# Altium PCB BMS_MASTER.PcbDoc (part 1 of 2)
Units mm, origin at the board's own origin, x right, y up, seen from the top; angles counter-clockwise.
Board outline 297.7 x 100 mm, 4 copper layers (Top Layer, Layer 1, Layer 2, Bottom Layer), stack 0.603 mm thick; 101 components, 64 nets, 488 pads, 105 vias.
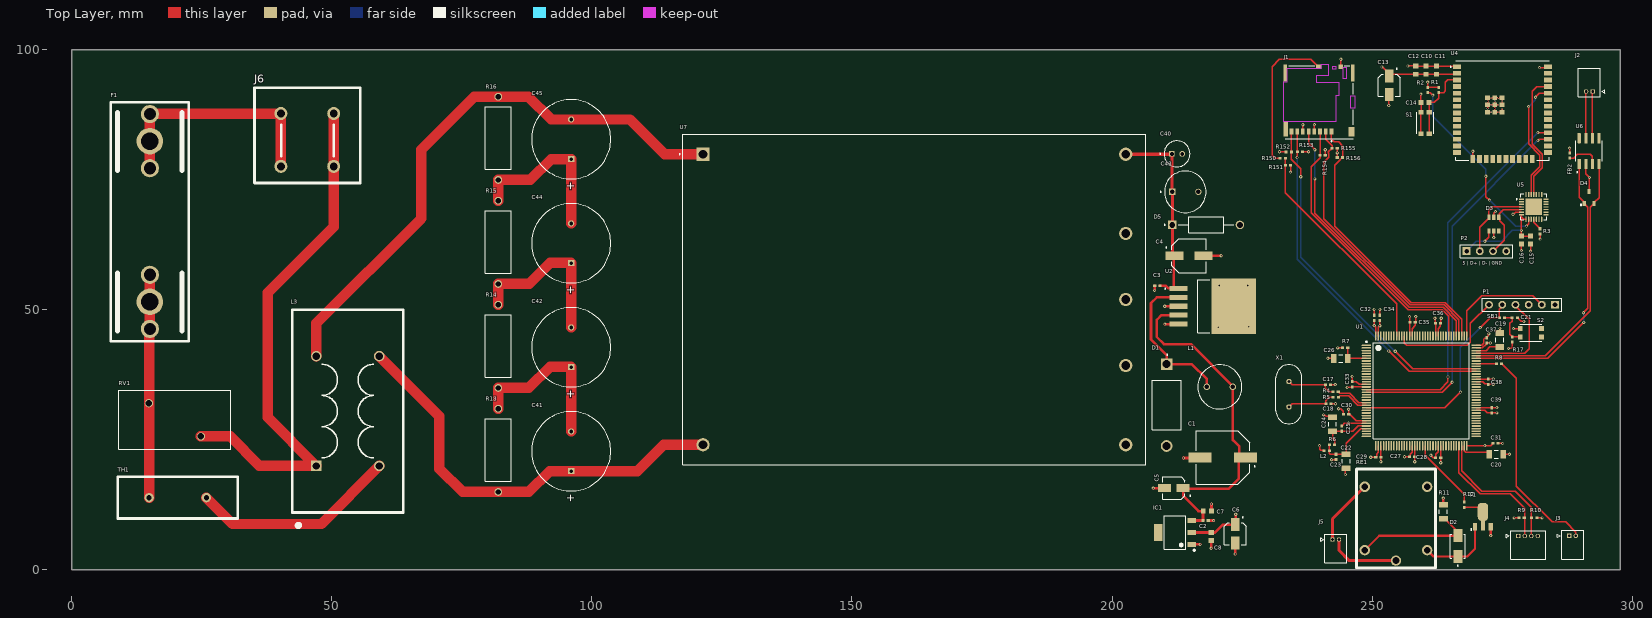
[diagram p0: Top Layer view]
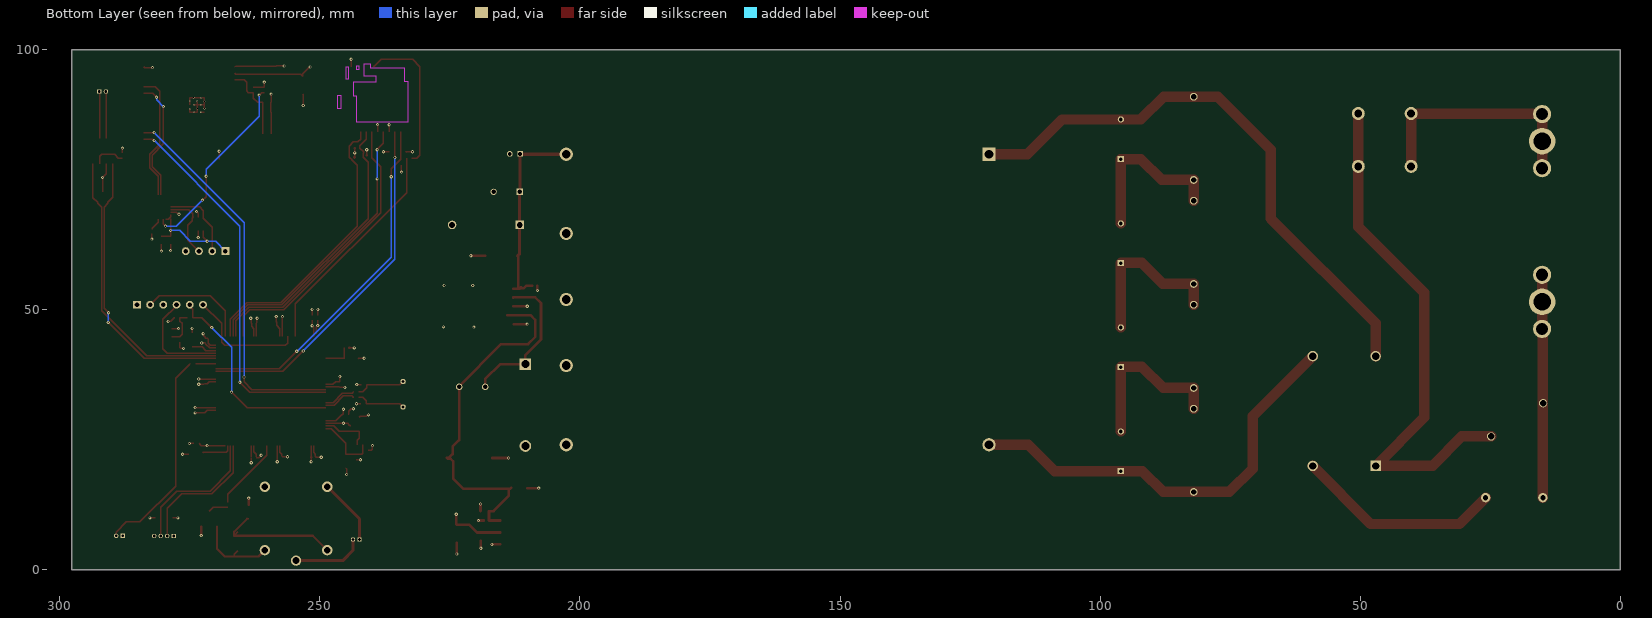
[diagram p1: Bottom Layer view, seen from below]
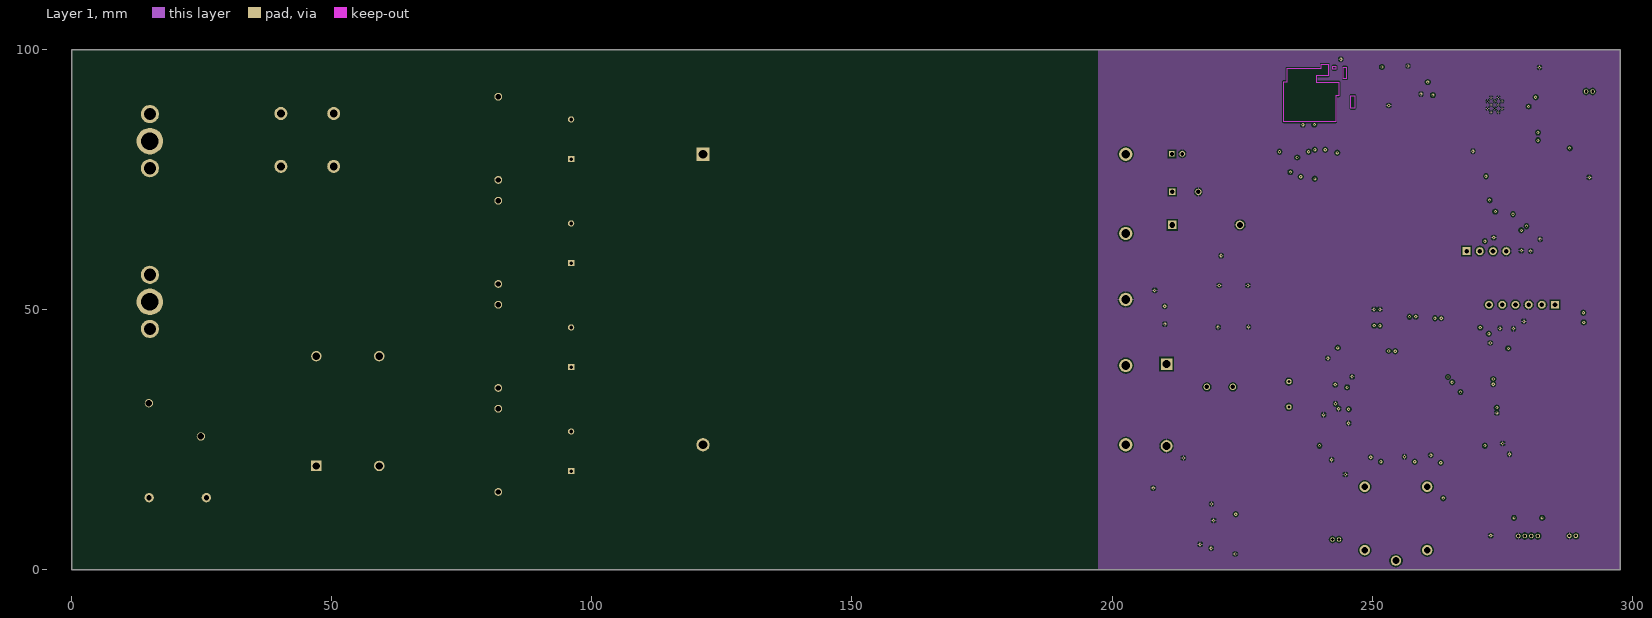
[diagram p2: Layer 1]
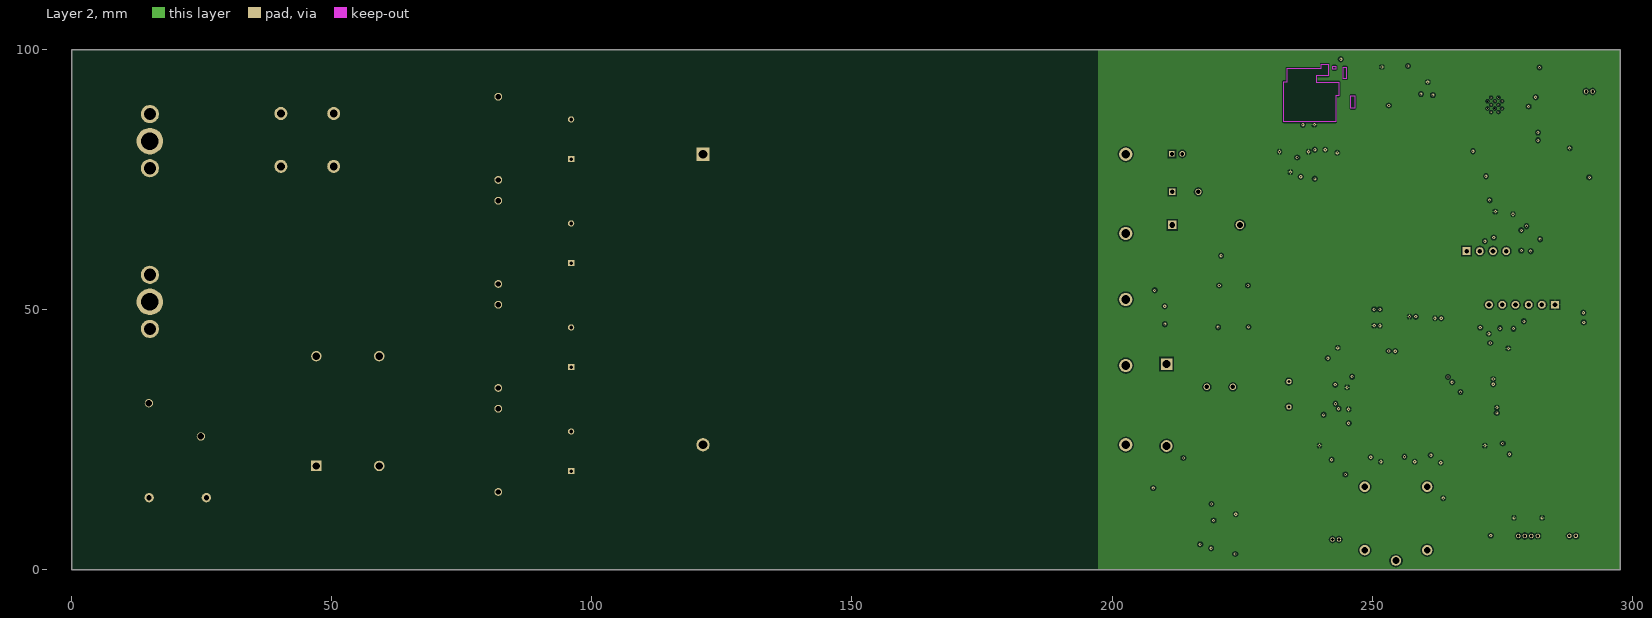
[diagram p3: Layer 2]

## Layer stack, top to bottom
Top Solder: solder mask 0.0102, Solder Resist, Dk 3.5
Top Layer: signal copper 0.0356
Dielectric 2: prepreg 0.0711, PP-006, Dk 4.1
Layer 1: signal copper 0.035
Dielectric 1: dielectric 0.32, FR-4, Dk 4.8
Layer 2: signal copper 0.035
Dielectric 3: prepreg 0.0711, PP-006, Dk 4.1
Bottom Layer: signal copper 0.0356
Bottom Solder: solder mask 0.0102, Solder Resist, Dk 3.5

## Board outline
0,0 297.7,0 297.7,100 0,100

## Design rules (kind name [scope] priority, off if disabled: settings)
Clearance [All] p1: gap=0.254 ignorepadtopadclearanceinfootprint=FALSE except(0: Arc-Hole Track-Hole SMDPad-Hole Via-Hole Fill-Hole Poly-Hole Region-Hole Text-Hole; 0.127: SMDPad-SMDPad; 0.2: Arc-Arc Arc-Track Arc-SMDPad Arc-THPad Track-Track Track-SMDPad Track-THPad; 0.5: THPad-THPad THPad-Hole)
PolygonConnect [All] p1: connectstyle=Relief reliefconductorwidth=0.254 reliefentries=4 polygonreliefangle="90 Angle" airgapwidth=0.254
RoomDefinition PSU [InComponentClass('PSU')] p1: confinementstyle=ConfineIn formatcopy=TRUE lockcomponents=FALSE outline 206.8,0 230,0 230,64.2 206.8,64.2
RoomDefinition HV_PSU [InComponentClass('HV_PSU')] p2: confinementstyle=ConfineIn formatcopy=TRUE lockcomponents=FALSE outline 0,0 230,0 230,100 0,100
RoomDefinition WIFI [InComponentClass('WIFI')] p3: confinementstyle=ConfineIn formatcopy=TRUE lockcomponents=FALSE outline 247.2,58.51 286.91,58.51 286.91,100 247.2,100
RoomDefinition SDCARD [InComponentClass('SDCARD')] p4: confinementstyle=ConfineIn formatcopy=TRUE lockcomponents=FALSE outline 230,58.5 247.2,58.5 247.2,99.75 230,99.75
RoomDefinition MCU [InComponentClass('MCU')] p5: confinementstyle=ConfineIn formatcopy=TRUE lockcomponents=FALSE outline 230,0 297.8,0 297.8,58.5 230,58.5
RoomDefinition CAN [InComponentClass('CAN')] p6: confinementstyle=ConfineIn formatcopy=TRUE lockcomponents=FALSE outline 286.91,58.51 297.7,58.51 297.7,100 286.91,100
RoutingVias [All] p1: holewidth=0.3 width=0.6 viastyle="Through Hole" minholewidth=0.24 minwidth=0.46 maxholewidth=1 maxwidth=1.4
SolderMaskExpansion [All] p1: expansion=0.102 istentingtop=FALSE
Width [All] p1: maxlimit=5 minlimit=0.09 preferedwidth=0.254 midlayer1_minwidth=0.254 midlayer1_maxwidth=0.254 midlayer2_minwidth=0.254 midlayer2_maxwidth=0.254 minimp=50.000000 maximp=50.000000 favimp=50.000000
30 further rules are at their usual default settings.

## Classes and differential pairs
component class HV_PSU: C40 C41 C42 C43 C44 C45 D5 F1 J6 L3 R13 R14 R15 R16 RV1 TH1 U7
component class CAN: D4 FB2 J2 U6
component class WIFI: C10 C11 C12 C13 C14 C15 C16 D3 P2 R1 R2 R3 S1 U4 U5
component class SDCARD: J1 R150 R151 R152 R153 R154 R155 R156
component class PSU: C1 C2 C3 C4 C5 C6 C7 C8 D1 IC1 L1 U2
component class MCU: C17 C18 C19 C20 C21 C22 C23 C24 C25 C26 C27 C28 C29 C30 C31 C32 C33 C34 C35 C36 C37 C38 C39 D2 J3 J4 J5 L2 P1 R4 R5 R6 R7 R8 R9 R10 R11 R12 R17 RE1 S2 SB1 T1 U1 X1

## Components (designator, comment, footprint, x,y, rotation, side; value= is the part's Value field where it differs from the comment)
C1 "330uF" CAP_16SVP330M 221.3,21.6 r180 top
C2 "Cap" 0402 218,9.5 r180 top value=100nF
C3 "Cap" 0402 208.72,54.68 r0 top value=1uF
C4 "680uF" CAP_16SVPC100M 214.8,60.4 r0 top
C5 "4,7uF" CAP_EEE1CA100SR 211.88,15.74 r180 top
C6 "10uF" CAP_EEE1CA100SR 223.7,6.95 r270 top
C7 "100nF" CAPC1608X90N 218.33,11.32 r0 top
C8 "100nF" CAPC1608X90N 219.08,6.42 r270 top
C10 "10uF" CAPC1608X90N 260.4,96.1 r90 top
C11 "100nF" CAPC1608X90N 262.4,96.1 r90 top
C12 "100nF" CAPC1608X90N 258.4,96.1 r270 top
C13 "4.7u" CAP_EEE1CA100SR 253.3,93.2 r270 top
C14 "100nF" CAPC1608X90N 260.2,89.9 r0 top
C15 "100nF" CAPC1608X90N 280.474,63.425 r90 top
C16 "1uF" CAPC1608X90N 278.7,63.425 r90 top
C17 "20pF" 0402 241.512,35.644 r0 top value=100nF
C18 "20pF" 0402 241.612,31.944 r0 top value=100nF
C19 "2.2uF" C1206 274.54,44.22 r90 top
C20 "2.2uF" C1206 273.86,22.246 r0 top
C21 "100nF" 0402 277.44,48.52 r180 top
C22 "1uF" C1206 245.012,20.894 r270 top value=10uF
C23 "100nF" 0402 243.062,21.734 r90 top
C24 "1uF" C1206 242.412,27.994 r90 top value=10uF
C25 "100nF" 0402 244.192,27.174 r90 top
C26 "1uF" C1206 243.97,40.65 r0 top value=100nF
C27 "100nF" 0402 257.7,21.8 r180 top
C28 "100nF" 0402 262.7,21.6 r180 top
C29 "100nF" 0402 251.2,21.7 r180 top
C30 "100nF" 0402 245.012,29.964 r180 top
C31 "100nF" 0402 273.75,24.35 r0 top
C32 "100nF" 0402 250.412,48.481 r90 top
C33 "100nF" 0402 246.2,35.7 r90 top
C34 "100nF" 0402 251.512,48.481 r90 top
C35 "100nF" 0402 257.812,47.644 r0 top
C36 "100nF" 0402 262.69,47.44 r0 top
C37 "100nF" 0402 272.06,44.15 r270 top
C38 "100nF" 0402 272.31,36.19 r270 top
C39 "100nF" 0402 273.01,30.68 r270 top
C40 "EEUEB1H2R2S" CAPPRD200W50D500H1100 212.5,80 r0 top
C41 "Cap Pol1" RB7.6-15 96,22.81 r270 top value=47uF/450v
C42 "Cap Pol1" RB7.6-15 96,42.81 r270 top value=47uF/450v
C43 "EEUFR1V221B" CAPPRD500W60D800H1150 214.1,72.696 r0 top
C44 "Cap Pol1" RB7.6-15 96,62.81 r270 top value=47uF/450v
C45 "Cap Pol1" RB7.6-15 96,82.81 r270 top value=47uF/450v
D1 "MBR360" DIOAD1950W125L950D560 210.5,31.7 r270 top
D2 "B160-13-F" DIODE_B160-13-F 266.497,4.58 r90 top
D3 "TVS Diode Array" SOT23-6-V2 273.4,65.2 r0 top
D4 "PESD2CAN,215" SOT95P230X110-3N 291.75,71.61 r90 top
D5 "P6KE20CA" DIOAD1300W80L670D310 218.1,66.341 r0 top
F1 "Heavy Duty Fuse Clip" 8040.2012.01 15,67 r270 top
FB2 "60R@100MHz" 0402 288,79.7 r90 top
IC1 "SPX1117M3-L-3-3/TR" SOT230P700X180-3N 212.1,7.2 r180 top
J1 "503398-1892" MOLEX_503398-1892 239.82,89.909 r180 top
J2 "530480210" MOLEX_530480210 292.4,92 r180 top
J3 "530480210 do LED" MOLEX_530480210 287.94,6.54 r0 top
J4 "530480410" MOLEX_530480410 278.13,6.53 r0 top
J5 "530480210" MOLEX_530480210 242.39,5.85 r0 top
J6 "14020225402000" 14020225402000 45.27,82.68 r180 top
L1 "AIUR-06-181" INDRD500W70D850H750 220.728,35.2 r0 top
L2 "BEAD" 0402 241.292,22.954 r0 top value=100uH
L3 "Line filter" SCF29XV-070-1R2A030JV 53.05,30.55 r90 top
P1 "Header 6" HDR1X6 285.19,50.99 r180 top
P2 "Header 4" HDR1X4 268.18,61.3 r0 top
R1 "10k" 0402 262.8,92.3 r270 top
R2 "4.7k" 0402 260.7,92.3 r90 top
R3 "10k" 0402 282.3,65.1 r270 top
R4 "0" 0402 242.992,34.274 r180 top value=10K
R5 "220" 0402 243.012,33.198 r180 top value=10K
R6 "0" 0402 242.312,24.058 r0 top value=10K
R7 "0" 0402 244.82,42.69 r0 top value=10K
R8 "100" 0402 274.42,39.67 r180 top value=10K
R9 "4.7k" 0402 278.77,10.01 r0 top value=10K
R10 "4.7k" 0402 281.18,10.02 r180 top value=10K
R11 "Res1" C1206 263.704,11.21 r90 top value=2R3
R12 "2.2k" 0402 267.73,12.54 r270 top value=10K
R13 "OY100KE" RESAD4700W80L1900D700 82,23 r90 top
R14 "OY100KE" RESAD4700W80L1900D700 82,43 r90 top
R15 "OY100KE" RESAD4700W80L1900D700 82,63 r90 top
R16 "OY100KE" RESAD4700W80L1900D700 82,83 r90 top
R17 "100K" 0402 276.96,44.31 r270 top value=10K
R150 "Res1" 0402 232.83,79.16 r0 top value=0
R151 "Res1" 0402 233.84,77.8 r0 top value=10K
R152 "Res1" 0402 233.98,80.36 r180 top value=47K
R153 "Res1" 0402 236.134,80.38 r0 top value=47K
R154 "Res1" 0402 240.51,79.76 r0 top value=47K
R155 "Res1" 0402 242.8,81.1 r0 top value=47K
R156 "Res1" 0402 243.8,79.3 r180 top value=47K
RE1 "36.11.9.003.4011" 36.11.9.003.4011 262.2,19.4 r90 top
RV1 "B72220S0102K101" VAR_B72220S0102K101 19.81,28.87 r180 top
S1 "KMR621NGLFS" SW_KMR621NGLFS 260.2,85.95 r90 top
S2 "KMR621NGLFS" SW_KMR621NGLFS 280.53,45.61 r0 top
SB1 "Circuit Breaker" 0402 275,48.5 r0 top
T1 "2DD1664Q-13" SOT150P410X160-3N 271.32,10.28 r0 top
TH1 "NTC THERMISTOR" MF72-10D20M 20.36,13.9 r0 top
U1 "STM32F429ZIT6" STM-LQFP144_N 259.462,34.431 r0 top
U2 "LM2596S-5V/NOPB" VREG_LM2596S-ADJ/NOPB 223.4,50.7 r0 top
U4 "ESP32-WROOM-32UE(M113EH6400UH3Q0)" MODULE_ESP32-WROOM-32UE(M113EH6400UH3Q0) 275.1,88.35 r0 top
U5 "CP2102-GM" QFN50P500X500X100-29N 281.1,69.8 r0 top
U6 "SN65HVD232DR" SOIC127P599X175-8N 291.738,80.54 r90 top
U7 "AE40-EW-S12" CONV_AE40-EW-S12 162,52 r0 top
X1 "8MHz" 8M-49S-SR 234.012,33.784 r90 top

## Footprints (in the part's own frame and the unit in brackets; to place one, negate y for a bottom-side part, rotate by r counter-clockwise, add the part's x,y. Pads: shape width x height; smd on the part's side, far side on the other; paste and mask are expansions set on the pad)
8M-49S-SR [mm]
  round 1.03 hole 0.63: 1(-2.44,0) 2(2.44,0)
  silkscreen extent -5.68,-2.5 5.68,2.5, body extent -5.68,-2.54 5.68,2.46, height 2.1
36.11.9.003.4011 [mm]
  round 2 hole 1.3: 1(-15.6,13.6) 2(-17.6,7.6) 3(-15.6,1.6) 4(-3.4,13.6) 5(-3.4,1.6)
  silkscreen extent -19,0 0,15.2
0402 [mm] "Chip Capacitor, Body 1.0x0.5mm, IPC High Density"
  rect 0.6x0.5 smd: 1(-0.5,0) 2(0.5,0)
  body extent -0.55,-0.3 0.55,0.3, height 1.3
8040.2012.01 [mm] "Heavy Duty Fuse Clip"
  round 3.5 hole 2.35: 1(-20.65,0) 1(-10.25,0) 2(10.25,0) 2(20.65,0)
  round 5.1 hole 3.4: 1(-15.45,0) 2(15.45,0)
  silkscreen extent -22.95,-7.5 23.05,7.5
14020225402000 [mm]
  round 2.5 hole 1.5: 1(-5.08,5.08) 1(-5.08,-5.08) 2(5.08,5.08) 2(5.08,-5.08)
  silkscreen extent -10.16,-10.02 10.16,8.28, body extent -10.06,-10 10.26,8.3, height 29.3
C1206 [mm] "Chip Capacitor, Body 3.2x1.6mm, IPC High Density"
  rect 1.1x1.7 smd: 1(-1.35,0) 2(1.35,0)
  silkscreen extent -0.4,-0.75 0.4,0.75, body extent -1.7,-0.9 1.7,0.9, height 1.3
CAP_16SVP330M [mm]
  rect 4.4x1.9 smd: 1(-4.35,0) 2(4.35,0)
  silkscreen extent -6.2,-5.15 5.15,5.15, body extent -5.5,-5.15 5.5,5.15, height 12.6
CAP_16SVPC100M [mm]
  rect 3.5x1.6 smd: 1(-2.8,0) 2(2.8,0)
  silkscreen extent -4.45,-3.3 3.3,3.3, body extent -3.65,-3.3 3.65,3.3, height 5.9
CAP_EEE1CA100SR [mm]
  rect 2.5x1.6 smd: 1(-1.75,0) 2(1.75,0)
  silkscreen extent -3.25,-2.15 2.15,2.15, body extent -2.5,-2.15 2.5,2.15, height 5.4
CAPC1608X90N [mm]
  rect 0.92x0.97 smd: 1(-0.775,0) 2(0.775,0)
  body extent -0.8,-0.4 0.8,0.4, height 0.95
CAPPRD200W50D500H1100 [mm]
  round 1.1 hole 0.75: N(1,0)
  rect 1.1x1.1 hole 0.75: P(-1,0)
  silkscreen extent -3.35,-2.5 2.5,2.5, body extent -2.5,-2.5 2.5,2.5, height 11
CAPPRD500W60D800H1150 [mm]
  round 1.2 hole 0.85: N(2.5,0)
  rect 1.2x1.2 hole 0.85: P(-2.5,0)
  silkscreen extent -4.85,-4 4,4, body extent -4,-4 4,4, height 11.5
CONV_AE40-EW-S12 [mm]
  rect 2.55x2.55 hole 1.7: 1(-40.65,27.94)
  round 2.55 hole 1.7: 2(-40.65,-27.94) 3(40.65,27.94) 4(40.65,12.7) 5(40.65,0) 6(40.65,-12.7) 7(40.65,-27.94)
  silkscreen extent -45.25,-31.75 44.5,31.75, body extent -44.46,-31.75 44.54,31.75, height 25
DIOAD1300W80L670D310 [mm]
  round 1.65 hole 1.1: A(6.5,0)
  rect 1.65x1.65 hole 1.1: C(-6.5,0)
  silkscreen extent -8.1,-1.55 5.32,1.55, body extent -6.9,-1.8 6.9,1.8, height 3.6
DIOAD1950W125L950D560 [mm]
  round 2.25 hole 1.5: A(7.874,0)
  rect 2.25x2.25 hole 1.5: C(-7.874,0)
  silkscreen extent -9.81,-2.8 4.75,2.8, body extent -8.43,-2.79 8.43,2.79, height 5.6
DIODE_B160-13-F [mm]
  rect 2.5x1.7 smd: 1(-2,0) 2(2,0)
  silkscreen extent -3.85,-1.46 2.3,1.46
HDR1X4 [mm] "Connector; Header; 4 Position"
  rect 1.5x1.5 hole 0.9: 1(0,0)
  round 1.5 hole 0.9: 2(2.54,0) 3(5.08,0) 4(7.62,0)
  silkscreen extent -1.27,-1.27 8.89,1.27
HDR1X6 [mm] "Connector; Header; 6 Position"
  rect 1.5x1.5 hole 0.9: 1(0,0)
  round 1.5 hole 0.9: 2(2.54,0) 3(5.08,0) 4(7.62,0) 5(10.16,0) 6(12.7,0)
  silkscreen extent -1.27,-1.27 13.97,1.27
INDRD500W70D850H750 [mm]
  round 1.25 hole 0.9: 1(-2.5,0) 2(2.5,0)
  silkscreen extent -4.25,-4.25 4.25,4.25, body extent -6.35,-6.35 6.35,6.35, height 18.03
MF72-10D20M [mm] "NTC THERMISTOR"
  round 1.8 hole 1: 1(-5.5,0) 2(5.5,0)
  silkscreen extent -11.5,-4 11.5,4
MODULE_ESP32-WROOM-32UE(M113EH6400UH3Q0) [mm]
  rect 1.5x0.9 smd: 1(-8.75,8.41) 2(-8.75,7.14) 3(-8.75,5.87) 4(-8.75,4.6) 5(-8.75,3.33) 6(-8.75,2.06) 7(-8.75,0.79) 8(-8.75,-0.48) 9(-8.75,-1.75) 10(-8.75,-3.02) 11(-8.75,-4.29) 12(-8.75,-5.56) 13(-8.75,-6.83) 14(-8.75,-8.1) 25(8.75,-8.1) 26(8.75,-6.83) 27(8.75,-5.56) 28(8.75,-4.29) 29(8.75,-3.02) 30(8.75,-1.75) 31(8.75,-0.48) 32(8.75,0.79) 33(8.75,2.06) 34(8.75,3.33) 35(8.75,4.6) 36(8.75,5.87) 37(8.75,7.14) 38(8.75,8.41)
  rect 0.9x1.5 smd: 15(-5.71,-9.35) 16(-4.44,-9.35) 17(-3.17,-9.35) 18(-1.9,-9.35) 19(-0.63,-9.35) 20(0.64,-9.35) 21(1.91,-9.35) 22(3.18,-9.35) 23(4.45,-9.35) 24(5.72,-9.35)
  rect 0.9x0.9 smd: 39_1(-2.9,2.47) 39_2(-1.5,2.47) 39_3(-0.1,2.47) 39_4(-2.9,1.07) 39_5(-1.5,1.07) 39_6(-0.1,1.07) 39_7(-2.9,-0.33) 39_8(-1.5,-0.33) 39_9(-0.1,-0.33)
  round 0.3 hole 0.2: 39_10(-2.2,2.47) 39_11(-0.8,2.47) 39_12(-2.9,1.77) 39_13(-1.5,1.77) 39_14(-0.1,1.77) 39_15(-2.2,1.07) 39_16(-0.8,1.07) 39_17(-2.9,0.37) 39_18(-1.5,0.37) 39_19(-0.1,0.37) 39_20(-2.2,-0.33) 39_21(-0.8,-0.33)
  silkscreen extent -10.1,-9.6 9,9.6, body extent -9,-9.6 9,9.6, height 3.35
MOLEX_503398-1892 [mm]
  rect 0.7x1.1 smd: 1(-2.38,5.625) 2(-1.28,5.625) 3(-0.18,5.625) 4(0.92,5.625) 5(2.02,5.625) 6(3.12,5.625) 7(4.22,5.625) 8(5.32,5.625)
  rect 0.9x0.93 smd: 9(-4.17,-6.84)
  rect 1.05x0.78 smd: 10(0.095,-6.915)
  rect 1.14x1.83 smd: P1(-6.26,5.61)
  rect 0.86x2.8 smd: P2(6.4,5.125)
  rect 0.7x3.33 smd: P3(-6.48,-5.64) P4(6.48,-5.64)
  Keep-Out Layer region: 6.83,-3.975 6.13,-3.975 6.13,-6.525 -0.43,-6.525 -0.43,-7.305 -1.73,-7.305 -1.73,-5.125 0.57,-5.125 0.57,-3.875 -3.82,-3.875 -3.82,-1.275 -3.17,-1.275 -3.17,3.725 6.83,3.725
  Keep-Out Layer region: -6.13,-1.276 -6.836,-1.276 -6.836,1.125 -6.13,1.125
  Keep-Out Layer region: -4.685,-6.738 -5.245,-6.738 -5.245,-4.575 -4.685,-4.575
  Keep-Out Layer region: -2.67,-6.93 -3.223,-6.93 -3.223,-6.375 -2.67,-6.375
  silkscreen extent -6.55,-7.02 6.55,7.57, body extent -6.55,-7.02 6.55,7.04, height 1.4
MOLEX_530480210 [mm]
  rect 0.85x0.85 / inner round 0.85 / far side rect 0.85x0.85 hole 0.5 mask+0.076: 1(0,0)
  round 0.85 hole 0.5 mask+0.076: 2(1.25,0)
  silkscreen extent -2.3,-4.45 2.75,1.05, body extent -1.49,-4.48 2.76,1.02, height 3.52
MOLEX_530480410 [mm]
  rect 0.85x0.85 / inner round 0.85 / far side rect 0.85x0.85 hole 0.5 mask+0.076: 1(0,0)
  round 0.85 hole 0.5 mask+0.076: 2(1.25,0) 3(2.5,0) 4(3.75,0)
  silkscreen extent -2.3,-4.45 5.25,1.05, body extent -1.52,-4.46 5.23,1.04, height 3.52
QFN50P500X500X100-29N [mm]
  rrect50% 0.97x0.26 smd: 1(-2.37,1.5) 2(-2.37,1) 3(-2.37,0.5) 4(-2.37,0) 5(-2.37,-0.5) 6(-2.37,-1) 7(-2.37,-1.5) 15(2.37,-1.5) 16(2.37,-1) 17(2.37,-0.5) 18(2.37,0) 19(2.37,0.5) 20(2.37,1) 21(2.37,1.5)
  rrect50% 0.26x0.97 smd: 8(-1.5,-2.37) 9(-1,-2.37) 10(-0.5,-2.37) 11(0,-2.37) 12(0.5,-2.37) 13(1,-2.37) 14(1.5,-2.37) 22(1.5,2.37) 23(1,2.37) 24(0.5,2.37) 25(0,2.37) 26(-0.5,2.37) 27(-1,2.37) 28(-1.5,2.37)
  rect 3.15x3.15 smd paste-0.585: 29(0,0)
  silkscreen extent -3.4,-2.5 2.5,2.5, body extent -2.5,-2.5 2.5,2.5, height 1
RB7.6-15 [mm] "Polarized Capacitor (Radial); 2 Leads"
  rect 1.2x1.2 hole 0.7: 1(3.81,0)
  round 1.2 hole 0.7: 2(-3.81,0)
  silkscreen extent -7.62,-7.62 7.62,7.62
RESAD4700W80L1900D700 [mm]
  round 1.5 hole 1: 1(-8,0) 2(8,0)
  silkscreen extent -5.97,-2.5 6.05,2.5
SCF29XV-070-1R2A030JV [mm]
  rect 2x2 hole 1.4: 1(-10.55,6.05)
  round 2 hole 1.4: 2(-10.55,-6.05) 3(10.55,6.05) 4(10.55,-6.05)
  silkscreen extent -22.2,-10.7 19.5,10.7
SOIC127P599X175-8N [mm]
  rrect25% 1.97x0.6 smd: 1(-2.47,1.905) 2(-2.47,0.635) 3(-2.47,-0.635) 4(-2.47,-1.905) 5(2.47,-1.905) 6(2.47,-0.635) 7(2.47,0.635) 8(2.47,1.905)
  silkscreen extent -4.14,-2.52 1.95,2.52, body extent -3,-2.45 3,2.45, height 1.75
SOT23-6-V2 [mm] "SOT23-6"
  round 0.3 on Top Overlay: 1(-1.6,-0.1)
  rect 0.6x1 smd: 1(-0.95,0) 2(0,0) 3(0.95,0) 4(0.95,2.6) 5(0,2.6) 6(-0.95,2.6)
  body extent -1.46,0.13 1.46,2.47, height 1
SOT95P230X110-3N [mm]
  rect 1x0.6 smd: 1(-1.15,0.95) 2(-1.15,-0.95) 3(1.15,0)
  silkscreen extent -1.54,1.46 -1.26,1.74, body extent -1.15,-1.45 1.15,1.45, height 1.1
SOT150P410X160-3N [mm]
  rect 0.8x1.4 smd: 1(-1.499,-1.981) 3(1.499,-1.981)
  rect 0.8x1.9 smd: 2(0,-1.727)
  rrect75% 2x3.5 smd paste-3: 4(0,0.889)
  silkscreen extent -2.38,-2.63 -2.12,-2.37
SOT230P700X180-3N [mm]
  rect 1.65x0.95 smd: 1(-3.2,2.3) 2(-3.2,0) 3(-3.2,-2.3)
  rect 1.65x3.2 smd: 4(3.2,0)
  silkscreen extent -3.8,-3.25 2.05,3.5, body extent -3.52,-3.25 3.52,3.25, height 1.8
STM-LQFP144_N [mm] "Thin QFP, 144-Leads, Body 20x20mm, Pitch 0.5mm, IPC Medium Density"
  oval 1.8x0.3 smd: 1(-10.55,8.75) 2(-10.55,8.25) 3(-10.55,7.75) 4(-10.55,7.25) 5(-10.55,6.75) 6(-10.55,6.25) 7(-10.55,5.75) 8(-10.55,5.25) 9(-10.55,4.75) 10(-10.55,4.25) 11(-10.55,3.75) 12(-10.55,3.25) 13(-10.55,2.75) 14(-10.55,2.25) 15(-10.55,1.75) 16(-10.55,1.25) 17(-10.55,0.75) 18(-10.55,0.25) 19(-10.55,-0.25) 20(-10.55,-0.75) 21(-10.55,-1.25) 22(-10.55,-1.75) 23(-10.55,-2.25) 24(-10.55,-2.75) 25(-10.55,-3.25) 26(-10.55,-3.75) 27(-10.55,-4.25) 28(-10.55,-4.75) 29(-10.55,-5.25) 30(-10.55,-5.75) 31(-10.55,-6.25) 32(-10.55,-6.75) 33(-10.55,-7.25) 34(-10.55,-7.75) 35(-10.55,-8.25) 36(-10.55,-8.75) 73(10.55,-8.75) 74(10.55,-8.25) 75(10.55,-7.75) 76(10.55,-7.25) 77(10.55,-6.75) 78(10.55,-6.25) 79(10.55,-5.75) 80(10.55,-5.25) 81(10.55,-4.75) 82(10.55,-4.25) 83(10.55,-3.75) 84(10.55,-3.25) 85(10.55,-2.75) 86(10.55,-2.25) 87(10.55,-1.75) 88(10.55,-1.25) 89(10.55,-0.75) 90(10.55,-0.25) 91(10.55,0.25) 92(10.55,0.75) 93(10.55,1.25) 94(10.55,1.75) 95(10.55,2.25) 96(10.55,2.75) 97(10.55,3.25) 98(10.55,3.75) 99(10.55,4.25) 100(10.55,4.75) 101(10.55,5.25) 102(10.55,5.75) 103(10.55,6.25) 104(10.55,6.75) 105(10.55,7.25) 106(10.55,7.75) 107(10.55,8.25) 108(10.55,8.75)
  oval 0.3x1.8 smd: 37(-8.75,-10.55) 38(-8.25,-10.55) 39(-7.75,-10.55) 40(-7.25,-10.55) 41(-6.75,-10.55) 42(-6.25,-10.55) 43(-5.75,-10.55) 44(-5.25,-10.55) 45(-4.75,-10.55) 46(-4.25,-10.55) 47(-3.75,-10.55) 48(-3.25,-10.55) 49(-2.75,-10.55) 50(-2.25,-10.55) 51(-1.75,-10.55) 52(-1.25,-10.55) 53(-0.75,-10.55) 54(-0.25,-10.55) 55(0.25,-10.55) 56(0.75,-10.55) 57(1.25,-10.55) 58(1.75,-10.55) 59(2.25,-10.55) 60(2.75,-10.55) 61(3.25,-10.55) 62(3.75,-10.55) 63(4.25,-10.55) 64(4.75,-10.55) 65(5.25,-10.55) 66(5.75,-10.55) 67(6.25,-10.55) 68(6.75,-10.55) 69(7.25,-10.55) 70(7.75,-10.55) 71(8.25,-10.55) 72(8.75,-10.55) 109(8.75,10.55) 110(8.25,10.55) 111(7.75,10.55) 112(7.25,10.55) 113(6.75,10.55) 114(6.25,10.55) 115(5.75,10.55) 116(5.25,10.55) 117(4.75,10.55) 118(4.25,10.55) 119(3.75,10.55) 120(3.25,10.55) 121(2.75,10.55) 122(2.25,10.55) 123(1.75,10.55) 124(1.25,10.55) 125(0.75,10.55) 126(0.25,10.55) 127(-0.25,10.55) 128(-0.75,10.55) 129(-1.25,10.55) 130(-1.75,10.55) 131(-2.25,10.55) 132(-2.75,10.55) 133(-3.25,10.55) 134(-3.75,10.55) 135(-4.25,10.55) 136(-4.75,10.55) 137(-5.25,10.55) 138(-5.75,10.55) 139(-6.25,10.55) 140(-6.75,10.55) 141(-7.25,10.55) 142(-7.75,10.55) 143(-8.25,10.55) 144(-8.75,10.55)
  silkscreen extent -10.67,-9.25 9.25,9.57, body extent -10,-10 10,10, height 1.6
SW_KMR621NGLFS [mm]
  rect 0.9x1 smd: 1_1(-2.05,0.8) 1_2(2.05,0.8) 2_1(-2.05,-0.8) 2_2(2.05,-0.8)
  silkscreen extent -2.1,-1.62 2.1,1.62, body extent -2.3,-1.4 2.3,1.4, height 1.9
VAR_B72220S0102K101 [mm]
  round 1.6 hole 1.25: 1(-5,3.2) 2(5,-3.2)
  silkscreen extent -10.75,-5.7 10.75,5.7
VREG_LM2596S-ADJ/NOPB [mm]
  rect 3.4x1 smd paste-0.05 mask+0.07: 1(-10.6,3.4) 2(-10.6,1.7) 3(-10.6,0) 4(-10.6,-1.7) 5(-10.6,-3.4)
  rect 8.6x10.7 smd paste-0.05 mask+0.07: 6(0,0)
  silkscreen extent -13.3,-5.08 -4.62,5.08, body extent -11.24,-5.08 3.11,5.08, height 4.78

## Part data
C1: library part 16SVP330M, Package=None, Availability=Unavailable, MP=16SVP330M, Price=None
C2 C3: "Capacitor", LatestRevisionDate=17-Jul-2002, LatestRevisionNote="Re-released for DXP Platform.", PackageDescription="Radial Cap, Thru-Hole; 2 Leads; 0.3 in Pin Spacing", PackageReference=RAD-0.3, Published=8-Jun-2000, Publisher="Altium Limited"
C4: library part 16SVPC100M, Package=None, Availability=Unavailable, MP=16SVPC100M, Price=None
C5 C6 C13: library part EEE1CA100SR, "10ÂµF 16V Aluminum Electrolytic Capacitors Radial, Can - SMD 2000 Hrs @ 85Â°C", Package="RADIAL-2 Panasonic", Check_prices=https://www.snapeda.com/parts/EEE1CA100SR/Panasonic/view-part/?ref=eda, Digi-Key_Part_Number=PCE3878CT-ND, MF=Panasonic, MP=EEE1CA100SR, SnapEDA_Link=https://www.snapeda.com/parts/EEE1CA100SR/Panasonic/view-part/?ref=snap
C7 C8 C10 C11 C12 C14 C15 C16: library part C0603C104J4RAC, "0.1ÂµF Â±5% 16V Ceramic Capacitor X7R 0603 (1608 Metric)", Package="0603 KEMET", Availability=Warning, Check_prices=https://www.snapeda.com/parts/C0603C104J4RAC/KEMET/view-part/1763758/?ref=eda, MF=KEMET, MP=C0603C104J4RAC, Price=None, SnapEDA_Link=https://www.snapeda.com/parts/C0603C104J4RAC/KEMET/view-part/1763758/?ref=snap
C17 C18 C21 C23 C25 C26 C27 C28 C29 C30 C31 C32 C33 C34 C35 C36 C37 C38 C39: library part Capacitor_ST, "Capacitor 0402 / 0603 / 0805", Revision="July-2002: Re-released for DXP Platform."
C19 C20: library part "Cap Low ESR", "Low ESR Ceramic Capacitor (X7R)", Manuf_Part_1=CC1206KKX7R7BB225, Distrib=FARNELL, Manuf_1=www.yageo.com, Order=CC1206KKX7R7BB225, Revision="July-2002: Re-released for DXP Platform."
C22 C24: library part "Cap Pol1", "Polarized Capacitor (Radial)", Published=8-Jun-2000, Publisher="Altium Limited", Revision="July-2002: Re-released for DXP Platform."
C40: "CAPACITOR, 2.2UF, 50V, 5X11MM; Capacitance:2.2F; Capacitance Tolerance: 20%; Voltage Rating:50V; Life Time @ Temperature:5000 hours @ 105C; Height:11mm; Diameter:5mm; Capacitor Terminals:Radial Leaded; Lead Spacing:2mm; Operating Temperature Range:-40C to +105C; AC Ripple Current:15mA; Capacitor Mounting:Through Hole", Package="RADIAL-2 Panasonic", Availability="No availability data", Check_prices=https://www.snapeda.com/parts/EEUEB1H2R2S/Panasonic/view-part/5793710/?ref=eda, MF=Panasonic, MP=EEUEB1H2R2S, Price=None, SnapEDA_Link=https://www.snapeda.com/parts/EEUEB1H2R2S/Panasonic/view-part/5793710/?ref=snap
C41 C42 C44 C45: "Polarized Capacitor (Radial)", LatestRevisionDate=17-Jul-2002, LatestRevisionNote="Re-released for DXP Platform.", PackageDescription="Polarized Capacitor (Radial); 2 Leads", PackageReference=RB7.6-15, Published=8-Jun-2000, Publisher="Altium Limited"
C43: "Aluminum Electrolytic Capacitors - Radial Leaded 35VDC 220uF 20% L/S=5mm", Package="RADIAL-2 Panasonic", Availability="In Stock", Check_prices=https://www.snapeda.com/parts/EEU-FR1V221B/Panasonic/view-part/6222305/?ref=eda, MF=Panasonic, MP=EEU-FR1V221B, Price=None, Purchase-URL=https://pricing.snapeda.com/search/part/EEU-FR1V221B/?ref=eda, SnapEDA_Link=https://www.snapeda.com/parts/EEU-FR1V221B/Panasonic/view-part/6222305/?ref=snap
D1: "Diode Schottky 60V 3A Through Hole DO-201AD", Package="AXIAL LEAD-2 ON Semiconductor", Availability=Good, Check_prices=https://www.snapeda.com/parts/MBR360G/ON%20Semiconductor/view-part/53063/?ref=eda, MF="ON Semiconductor", MP=MBR360G, Price=None, Purchase-URL=https://pricing.snapeda.com/search/part/MBR360G/?ref=eda, SnapEDA_Link=https://www.snapeda.com/parts/MBR360G/ON%20Semiconductor/view-part/53063/?ref=snap
D2: "Diode Schottky 60V 1A Surface Mount SMA", Package="DO-214 Diodes Inc.", Availability=Unavailable, MF="Diodes Inc.", MP=B160-13-F, Price=None, SnapEDA_Link=https://www.snapeda.com/parts/B160-13-F/Diodes%20Inc./view-part/248179/?ref=snap
D3: library part AOZ8105, "Ultra-Low Capacitance TVS Diode Array"
D4: "ESD Suppressor Diode TVS Bi-Dir 24V Automotive 3-Pin SOT-23 T/R", Package="TO-236-3 Nexperia USA Inc.", Availability="In Stock", Check_prices=https://www.snapeda.com/parts/PESD2CAN,215/Nexperia/view-part/?ref=eda, MF="Nexperia USA Inc.", MP=PESD2CAN,215, Price=None, Purchase-URL=https://pricing.snapeda.com/search/part/PESD2CAN,215/?ref=eda, SnapEDA_Link=https://www.snapeda.com/parts/PESD2CAN,215/Nexperia/view-part/?ref=snap
D5: "600W, 20V, 5%, Bidirectional, TVS", Package="DO-15 Taiwan Semiconductor", Availability="In Stock", Check_prices=https://www.snapeda.com/parts/P6KE20CA/Taiwan+Semiconductor/view-part/?ref=eda, MF="Taiwan Semiconductor", MP=P6KE20CA, Price=None, Purchase-URL=https://pricing.snapeda.com/search/part/P6KE20CA/?ref=eda, SnapEDA_Link=https://www.snapeda.com/parts/P6KE20CA/Taiwan+Semiconductor/view-part/?ref=snap
F1: library part 8040.2012.01, "THT; 10x38mm; 15A"
FB2: library part "Circuit Breaker", "Circuit Breaker", LatestRevisionDate=17-Jul-2002, LatestRevisionNote="Re-released for DXP Platform.", PackageDescription="Switch; 2 Leads", PackageReference=SPST-2, Published=24-Mar-1999, Publisher="Altium Limited"
IC1: "Linear Voltage Regulator IC Positive Fixed 1 Output 800mA SOT-223", Package="SOT-223 Exar", Availability=Unavailable, MF="MaxLinear, Inc.", MP=SPX1117M3-L-3-3/TR, Price=None, SnapEDA_Link=https://www.snapeda.com/parts/SPX1117M3-L-3-3/TR/MaxLinear%2C%20Inc./view-part/376705/?ref=snap
J1: "9 (8 + 1) Position Card Connector Secure Digital - microSDâ„¢ Surface Mount, Right Angle Gold", Package=None, Availability="In Stock", Check_prices=https://www.snapeda.com/parts/5033981892/Molex/view-part/?ref=eda, MF=Molex, MP=5033981892, Price=None, Purchase-URL=https://pricing.snapeda.com/search/part/5033981892/?ref=eda, SnapEDA_Link=https://www.snapeda.com/parts/5033981892/Molex/view-part/?ref=snap
J2 J5: "Conn Shrouded Header (4 Sides) HDR 2 POS 1.25mm Solder RA Side Entry Thru-Hole PicoBladeâ„¢ Tray", Package=None, Availability="In Stock", Check_prices=https://www.snapeda.com/parts/530480210/Molex/view-part/?ref=eda, MF=Molex, MP=530480210, Price=None, Purchase-URL=https://pricing.snapeda.com/search/part/530480210/?ref=eda, SnapEDA_Link=https://www.snapeda.com/parts/530480210/Molex/view-part/?ref=snap
J3: library part 530480210, "Conn Shrouded Header (4 Sides) HDR 2 POS 1.25mm Solder RA Side Entry Thru-Hole PicoBladeâ„¢ Tray", Package=None, Availability="In Stock", Check_prices=https://www.snapeda.com/parts/530480210/Molex/view-part/?ref=eda, MF=Molex, MP=530480210, Price=None, Purchase-URL=https://pricing.snapeda.com/search/part/530480210/?ref=eda, SnapEDA_Link=https://www.snapeda.com/parts/530480210/Molex/view-part/?ref=snap
J4: Package=None, Availability=Unavailable, MP=530480410, Price=None
L1: "FIXED IND 180UH 1.6A 228 MOHM TH", Package="Radial Abracon", Availability="In Stock", Check_prices=https://www.snapeda.com/parts/AIUR-06-181/Abracon+LLC/view-part/?ref=eda, MF="Abracon LLC", MP=AIUR-06-181, Price=None, Purchase-URL=https://pricing.snapeda.com/search/part/AIUR-06-181/?ref=eda, SnapEDA_Link=https://www.snapeda.com/parts/AIUR-06-181/Abracon+LLC/view-part/?ref=snap
L2: library part Inductor, "Inductor", Manuf_Part_1=FCM1608KF-601T03, Order=FCM1608KF-601T03, Published=8-Jun-2000, Publisher="Altium Limited", Revision="July-2002: Re-released for DXP Platform."
L3: library part SCF29XV-070-1R2A030JV, "THT; 9,9mH; 19,2mΩ; -40÷150°C; SCF", Package="Vertical-4 KEMET", Digi-Key_Part_Number=399-10776-ND, Digi-Key_Purchase_URL=https://www.digikey.com/product-detail/en/kemet/SCF-02-1300/399-10776-ND/4290842?utm_source=snapeda&utm_medium=aggregator&utm_campaign=symbol, MF=KEMET, MP=SCF-02-1300, SnapEDA_Link=https://www.snapeda.com/parts/SCF-02-1300/KEMET/view-part/1536060/?ref=snap
P1: "Header, 6-Pin", LatestRevisionDate=17-Jul-2002, LatestRevisionNote="Re-released for DXP Platform.", Publisher="Altium Limited"
P2: "Header, 4-Pin", LatestRevisionDate=17-Jul-2002, LatestRevisionNote="Re-released for DXP Platform.", Publisher="Altium Limited"
R1 R2 R3: library part RK73H1JTTD1102F, "Rezystor, SMD 11 kOhm, Â± 1 %, 0603", Package=None, Availability=Unavailable, MP=RK73H1JTTD1102F, Price=None
R4 R5 R6 R7 R8 R9 R10 R12 R17: library part Resistor_ST, "Resistor 0402 / 0603 / 0805"
R11 R150 R151 R152 R153 R154 R155 R156: "Resistor", LatestRevisionDate=17-Jul-2002, LatestRevisionNote="Re-released for DXP Platform.", PackageDescription="Axial Device, Thru-Hole; 2 Leads; 0.3 in Pin Spacing", PackageReference=AXIAL-0.3, Published=8-Jun-2000, Publisher="Altium Limited"
R13 R14 R15 R16: "10 Ohms Â±10% 2W Through Hole Resistor Axial Moisture Resistant, Pulse Withstanding Ceramic", Package="Axial Ohmite", Availability=Good, Check_prices=https://www.snapeda.com/parts/OY100KE/Ohmite/view-part/1373894/?ref=eda, MF=Ohmite, MP=OY100KE, Price=None, Purchase-URL=https://pricing.snapeda.com/search/part/OY100KE/?ref=eda, SnapEDA_Link=https://www.snapeda.com/parts/OY100KE/Ohmite/view-part/1373894/?ref=snap
RE1: "Przekaźnik: elektromagnetyczny; SPDT; Ucewki : 3VDC; 15A; PCB; 25Ω"
RV1: "Var MOV 1100VAC/1465VDC 6500A 1800V Thru-Hole Radial Automotive Bulk", Package=None, Availability="In Stock", Check_prices=https://www.snapeda.com/parts/B72220S0102K101/TM+Electronics/view-part/?ref=eda, MF="TDK ELECTRONICS", MP=B72220S0102K101, Price=None, Purchase-URL=https://pricing.snapeda.com/search/part/B72220S0102K101/?ref=eda, SnapEDA_Link=https://www.snapeda.com/parts/B72220S0102K101/TM+Electronics/view-part/?ref=snap
S1 S2: "Tactile Switch SPST-NO Top Actuated Surface Mount", Package=None, Availability=Unavailable, MF=C&K, MP="KMR621NG LFS", Price=None, SnapEDA_Link=https://www.snapeda.com/parts/KMR621NG%20LFS/C%26K/view-part/2720743/?ref=snap
T1: "Transistor: NPN; bipolar; 32V; 1A; 1W; SOT89; automotive industry"
TH1: library part MF72-10D20M, "10Ω; 23mm; ±20%; THT; 2700K"
U1: "ARM Cortex-M4 32-bit MCU+FPU, 225 DMIPS, 2048 kB Flash, 256 kB Internal RAM, 114 I/Os, 144-pin LQFP, -40 to 85 degC, Tray", I/Os (High Current)=114, Manufacturer=STMicroelectronics, Operating Frequency(F) (Processor speed) (MHz)=180, Supplier Part Number 1=497-14053-ND, Supply Voltage(Vcc) max (V)=3.6, Supply Voltage(Vcc) min (V)=1.8, ComponentLink1Description="Manufacturer URL", ComponentLink1URL=http://www.st.com/web/en/home.html, ComponentLink2Description=Datasheet, ComponentLink2URL=http://www.st.com/st-web-ui/static/active/en/resource/technical/document/data_brief/DM00053488.pdf, ComponentLink3Description="Package Specification", ComponentLink3URL=http://www.st.com/st-web-ui/static/active/en/resource/technical/document/datasheet/DM00037051.pdf, Core="ARM Cortex-M4", D/A Converter=2x12-bit, DatasheetVersion="Rev. 2", FLASH Size (Prog) (kB)=2048, Internal RAM Size (kB)=256, Mounting Technology="Surface Mount", PackageDescription="144-Pin Low Profile Quad Flat Package, 20 x 20 mm Body, 0.5 mm Pitch", PackageReference=LQFP144, PackageVersion="Rev. 4, 06/2013", Packing=Tray, PartNumber=STM32F429ZIT6, Supplier 1=Digi-Key, Supplier 2=Newark, Supplier 3=Mouser, Supplier Part Number 2=06X3676, Supplier Part Number 3=511-STM32F429ZIT6
U2: library part LM2596S-ADJ/NOPB, "SIMPLE SWITCHER&reg; 4.5V to 40V, 3A Low Component Count Step-Down Regulator", Package="TO-263-5 Texas Instruments", Availability="In Stock", Check_prices=https://www.snapeda.com/parts/LM2596S-ADJ/NOPB/Texas+Instruments/view-part/?ref=eda, MF="Texas Instruments", MP=LM2596S-ADJ/NOPB, Price=None, Purchase-URL=https://pricing.snapeda.com/search/part/LM2596S-ADJ/NOPB/?ref=eda, SnapEDA_Link=https://www.snapeda.com/parts/LM2596S-ADJ/NOPB/Texas+Instruments/view-part/?ref=snap
U4: "Bluetooth, WiFi 802.11b/g/n, Bluetooth v4.2 +EDR, Class 1, 2 and 3 Transceiver Module 2.4GHz ~ 2.5GHz Antenna Not Included, U.FL Surface Mount", Package=None, Availability="Not in stock", Check_prices=https://www.snapeda.com/parts/ESP32-WROOM-32UE(M113EH6400UH3Q0)/Espressif+Systems/view-part/?ref=eda, MF="Espressif Systems", MP=ESP32-WROOM-32UE(M113EH6400UH3Q0), Price=None, SnapEDA_Link=https://www.snapeda.com/parts/ESP32-WROOM-32UE(M113EH6400UH3Q0)/Espressif+Systems/view-part/?ref=snap
U5: "USB Bridge, USB to UART USB 2.0 UART Interface 28-QFN (5x5)", Package="QFN-28 Silicon Labs", Availability="In Stock", Check_prices=https://www.snapeda.com/parts/CP2102-GM/Silicon+Labs/view-part/?ref=eda, MF="Silicon Labs", MP=CP2102-GM, Price=None, Purchase-URL=https://pricing.snapeda.com/search/part/CP2102-GM/?ref=eda, SnapEDA_Link=https://www.snapeda.com/parts/CP2102-GM/Silicon+Labs/view-part/?ref=snap
U6: "3.3 V CAN Transceiver 8-SOIC -40 to 85", Package="SOIC-8 Texas Instruments", Arrow_Electronics-Purchase-URL=https://snapeda.com/shop?store=Arrow+Electronics&id=184570, Availability=Good, DigiKey-Purchase-URL=https://snapeda.com/shop?store=DigiKey&id=184570, MF="Texas Instruments", Mouser-Purchase-URL=https://snapeda.com/shop?store=Mouser&id=184570, MP=SN65HVD232DR, Price=None, SnapEDA_Link=https://www.snapeda.com/parts/SN65HVD232DR/Texas%20Instruments/view-part/184570/?ref=snap, Texas_Instruments-Purchase-URL=https://snapeda.com/shop?store=Texas+Instruments&id=184570
U7: "40 W, 6:1 Input Range, Single Regulated Output,  7 Pin DIP, 4000 Vdc Isolation, Dc-Dc Converter", Package="DIP-7 CUI", Availability=Bad, Check_prices=https://www.snapeda.com/parts/AE40-EW-S12/CUI/view-part/2854828/?ref=eda, CUI_purchase_URL=https://www.cui.com/product/dc-dc-converters/isolated/ae40-ew-series?utm_source=snapeda.com&utm_medium=referral&utm_campaign=snapedaBOM, MF="CUI Inc.", MP=AE40-EW-S12, Price=None, Purchase-URL=https://pricing.snapeda.com/search/part/AE40-EW-S12/?ref=eda, SnapEDA_Link=https://www.snapeda.com/parts/AE40-EW-S12/CUI/view-part/2854828/?ref=snap
X1: library part 8M-49S-SR, "8MHz; ±30ppm; 20pF; THT; HC49-S", Package="HC49/US ECS International", Availability=Unavailable, MF="ECS Inc.", MP=ECS-160-20-4VX, Price=None, SnapEDA_Link=https://www.snapeda.com/parts/ECS-160-20-4VX/ECS%20Inc./view-part/47293/?ref=snap
SB1: Published=24-Mar-1999, Publisher="Altium Limited", Revision="July-2002: Re-released for DXP Platform.", Solder=YES

## Via types
v1: diameter 0.6, hole 0.3, Top Layer to Bottom Layer, 105 vias

## Nets (pads, with @x,y where several pads share a name; then routed paths per layer and width w, separated by ;. In a path a pad name is that pad's centre, name@x,y a point inside that pad or via, vN(x,y) a via of type N, cw(c..) or ccw(c..) an arc to the next point about the centre after c; other vN are vias at no path point)
3V3: 
11: J5.2 RE1.2 | length 13.8
  Top Layer w0.6: J5.2 243.64,3.76 245.62,1.78 RE1.2@254.539,1.78
14: J5.1 RE1.4 | length 12.7
  Top Layer w0.6: J5.1 242.39,9.831 RE1.4@248.539,15.98
+5: C1.1 C2.2 C5.1 C7.1 IC1.3 L1.2 U2.4 | length 70.6
  Top Layer w0.5: U2.4@214,49 U2.4 209.5,49 208.6,48.1 208.6,44.8 210,43.4 215.2,43.4 L1.2@223.4,35.2 ; IC1.3 215.48,9.5 215.57,9.59 215.66,9.5 C2.2 217.5,11.265 C7.1 216.618,11.32 213.707,14.231 213.707,15.343 213.25,15.8 213.42,15.63 222.46,15.63 224.4,17.57 224.4,20.9 225.1,21.6 C1.1@225.173,21.6 ; L1.2 223.228,24.982 224.473,23.737 224.473,22.3 C1.1@225.173,21.6 ; C1.1@225.173,21.393 225.443,21.393 C1.1 225.443,21.6 C1.1@225.173,21.6
+12: C3.2 C4.1 C40.P C43.P D5.C U2.1 U7.3 | length 39.6
  Top Layer w0.5: C3.2 210.32,54.68 210.868,54.132 U2.1@211.35,54.132 ; U2.1@211.35,54.35 211.6,54.1 U2.1 212.093,54.1 211.843,54.35 C4.1@211.843,60.4
  Top Layer w0.6: U7.3 C40.P@211.44,79.94 ; C40.P 211.55,79.95 211.55,72.746 C43.P D5.C 211.6,60.8 C4.1
CAN_H: J2.2 U6.7 | length 9
  Top Layer w0.254: U6.7 291.103,91.953 J2.2
CAN_L: J2.1 U6.6 | length 9
  Top Layer w0.254: J2.1@292.16,91.88 292.373,91.667 U6.6
CAN_RX: D4.1 U1.103 U6.1 | length 55.1
  Top Layer w0.254: U1.103 283.781,40.681 v1(290.7,47.6) ; U6.1 289.833,71.627 290.8,70.66 D4.1 291.5,69.76 291.5,50.326 v1(290.637,49.463)
  Bottom Layer w0.254: v1(290.637,49.463) 290.668,49.432 290.668,47.632 v1(290.7,47.6)
CAN_TX: D4.2 U1.104 U6.4 | length 54.5
  Top Layer w0.254: U1.104 283.318,41.181 292,49.863 292,69.76 D4.2 292.7,70.66 293.643,71.603 U6.4
D+: D3.6 P2.2 U5.4 | length 15.1
  Top Layer w0.254: P2.2 270.72,65.87 272.45,67.6 272.45,69.096 273.154,69.8 U5.4
D-: D3.4 P2.3 U5.5 | length 13.2
  Top Layer w0.254: P2.3 275.4,63.44 275.4,66.3 274.523,67.177 274.523,67.627 D3.4 274.432,67.882 274.432,68.532 275.2,69.3 U5.5
GND: C1.2 C2.1 C3.1 C4.2 C5.2 C6.2 C7.2 C8.2 C10.2 C11.2 C12.1 C13.2 C14.1 C15.1 C16.1 C17.2 C18.2 C19.2 C20.2 C21.1 C22.2 C23.1 C24.2 C25.2 C26.1 C27.2 C28.2 C29.2 C30.2 C31.2 C32.2 C33.2 C34.2 C35.2 C36.2 C37.2 C38.2 C39.2 C40.N C43.N D1.A D3.2 D4.3 D5.A IC1.1 J1.6 J1.9 J3.1 J4.1 P1.3 P2.4 R3.2 S1.1_1 S1.1_2 S2.1_1 T1.3 U1.16 U1.31 U1.38 U1.51 U1.61 U1.83 U1.94 U1.107 U1.120 U1.130 U2.3 U2.5 U2.6 U4.1 U4.15 U4.38 U4.39_1 U4.39_2 U4.39_3 U4.39_4 U4.39_5 U4.39_6 U4.39_7 U4.39_8 U4.39_9 U4.39_10 U4.39_11 U4.39_12 U4.39_13 U4.39_14 U4.39_15 U4.39_16 U4.39_17 U4.39_18 U4.39_19 U4.39_20 U4.39_21 U6.2 U7.5 | length 127.3
  Top Layer w0.254: v1(208.2,53.76) v1@208.21,53.77 ; C3.1@208.21,54.64 C3.1@208.25,54.68 ; U2.5@212.76,47.26 U2.5 ; IC1.1 IC1.1@215.31,4.91 ; C1.2@216.87,21.52 C1.2 ; C4.2@218.2,60.4 C4.2@218.22,60.42 ; C8.2@219.05,5.615 C8.2 ; C7.2 C7.2@219.12,11.335 ; C6.2@223.68,5.18 C6.2 ; J1.6 v1(236.7,85.6) ; v1(240.682,29.824) 240.776,29.824 241.09,29.51 242.246,29.51 C24.2 ; v1(241.5,40.7) 242.57,40.7 C26.1 ; C17.2 242.022,35.634 242.912,35.634 v1(242.922,35.624) ; C18.2 v1(242.972,31.944) ; v1(242.22,21.18) 242.247,21.207 243.035,21.207 C23.1 ; v1@243.563,30.994 244.018,30.994 244.502,30.51 244.502,29.974 C30.2 ; J1.9 244,96.759 v1(244,98.2) ; C25.2 244.192,27.724 244.315,27.847 244.365,27.847 244.699,28.181 U1.31 ; v1(244.88,18.35) 244.88,19.412 C22.2 ; v1(246.16,37.16) 246.18,37.14 246.18,36.22 C33.2 246.977,36.2 247.496,35.681 U1.16 ; v1(249.74,21.66) 249.76,21.68 250.68,21.68 C29.2 250.75,21.7 250.873,21.823 250.873,22.261 251.212,22.6 U1.38 ; v1(250.4,50.1) 250.406,50.094 250.406,48.987 C32.2 ; v1(251.5,50.1) 251.506,50.094 251.506,48.987 C34.2 ; v1@253.184,89.316 253.184,91.334 C13.2 ; v1(256.24,21.764) 256.258,21.782 257.182,21.782 C27.2 257.25,21.8 257.373,21.923 257.373,22.261 257.712,22.6 U1.51 ; v1(256.9,96.9) 258.375,96.9 C12.1 259.875,96.875 C11.2 266.235,96.875 U4.1 ; U1.130 257.712,46.423 258.302,47.013 258.302,47.634 C35.2 258.356,47.688 258.356,48.656 v1(258.4,48.7) ; S1.1_1 S1.1_2 259.425,88.025 C14.1 259.4,89.925 v1(259.4,91.5) ; v1(261.3,22.045) 261.74,21.605 262.195,21.605 C28.2 ; C28.2@262.2,21.738 262.2,22.2 262.712,22.712 U1.61 ; U1.120 262.712,46.382 263.139,46.809 263.139,47.389 C36.2 263.245,47.495 263.245,48.345 v1(263.3,48.4) ; U4.15 269.4,79.01 v1(269.4,80.5) ; U1.83 271.671,30.681 272.172,30.18 C39.2 273.02,30.19 273.99,30.19 v1(274,30.2) ; U1.94 271.326,36.181 271.679,35.828 272.187,35.828 272.31,35.705 C38.2 ; U1.107 271.191,42.681 271.937,43.427 271.937,43.477 272.1,43.64 C37.2@272.15,43.64 ; C37.2 272.71,43.65 v1(272.72,43.64) ; U4.39_7 U4.39_20 ; U4.39_17 U4.39_4 ; C38.2@272.33,35.7 273.3,35.7 v1(273.31,35.71) ; T1.3 T1.3@272.83,8.288 ; v1(273.4,63.9) D3.2 ; U4.39_13 U4.39_5 ; C31.2 274.27,24.33 275.09,24.33 v1(275.11,24.31) ; U4.39_16 U4.39_5 ; C19.2 274.59,45.62 v1(274.59,46.46) ; U4.39_19 U4.39_9 U4.39_21 U4.39_8 U4.39_18 U4.39_5 ; U4.39_6 U4.39_14 U4.39_3 U4.39_11 U4.39_2 U4.39_10 U4.39_1 U4.39_12 U4.39_4 ; C20.2 275.216,22.24 v1(276.42,22.24) ; v1(277.19,46.39) 278.46,46.39 S2.1_1 ; C21.1 277.99,48.52 278.644,47.866 279.134,47.866 v1(279.2,47.8) ; v1(278.7,61.4) C16.1 ; C15.1 280.5,62.624 v1(280.5,61.3) ; v1(282.2,96.6) 283.69,96.6 U4.38 ; R3.2 282.302,64.598 282.302,63.604 v1(282.303,63.603) ; U6.2 291.103,76.147 v1(291.775,75.475) 291.775,72.785 D4.3 ; U4.39_4 U4.39_15 U4.39_5
  Top Layer w0.5: v1(207.93,15.74) C5.2 ; v1@208.21,53.77 C3.1@208.21,54.64 ; v1(210.15,50.7) U2.3 ; v1(210.17,47.26) U2.5@212.76,47.26 ; v1(213.73,21.52) C1.2@216.87,21.52 ; IC1.1@215.31,4.91 v1(216.94,4.91) ; C4.2@218.22,60.42 v1(220.97,60.42) ; C2.1 v1(219.53,9.5) ; v1(219.05,4.18) C8.2@219.05,5.615 ; C7.2@219.12,11.335 v1(219.12,12.68) ; v1(223.68,3.07) C6.2@223.68,5.18 ; v1(272.83,6.6) T1.3@272.83,8.288
  other v1: 245.5,28.2 243.562,30.994 220.4,46.68 226.25,46.72 220.61,54.69 226.13,54.69 253.2,89.3
IO16: U1.19 U4.27 | length 72.6
  Top Layer w0.254: U1.19 263.481,34.181 v1(265.4,36.1) ; v1(281.9,82.6) 281.994,82.6 282.184,82.79 U4.27
  Bottom Layer w0.254: v1(265.4,36.1) 265.4,66.1 v1(281.9,82.6)
IO17: U1.18 U4.28 | length 73.3
  Top Layer w0.254: U1.18 263.081,34.681 264.6,36.2 v1(264.6,37.1) ; v1(281.9,84.1) 283.81,84.1 U4.28
  Bottom Layer w0.254: v1(264.6,37.1) 264.6,66.8 v1(281.9,84.1)
NetC14_2: C14.2 R1.2 S1.2_1 S1.2_2 U4.3 | length 14.8
  Top Layer w0.254: S1.2_1 S1.2_2 260.975,88.025 C14.2 262,89.9 262.8,90.7 R1.2 263.8,91.8 264.1,92.1 264.1,93.8 264.52,94.22 U4.3
NetC17_1: C17.1 R4.2 X1.2 | length 9.6
  Top Layer w0.254: X1.2 234.069,36.224 234.649,35.644 C17.1 241.012,35.044 241.782,34.274 R4.2
NetC18_1: C18.1 R5.2 X1.1 | length 9.6
  Top Layer w0.254: X1.1 234.039,31.344 234.639,31.944 C18.1 241.112,32.544 241.767,33.198 R5.2
NetC19_1: C19.1 U1.106 | length 4.8
  Top Layer w0.254: U1.106 271.951,42.181 272.64,42.87 C19.1
NetC20_1: C20.1 U1.71 | length 5.9
  Top Layer w0.254: U1.71 267.721,23.872 267.721,22.948 268.015,22.654 272.396,22.654 C20.1@272.51,22.54
NetC21_2: C21.2 R17.1 S2.2_1 SB1.2 | length 7.1
  Top Layer w0.254: SB1.2 275.51,48.51 276.93,48.51 C21.2 276.94,47.84 276.5,47.4 276.5,45.3 276.52,45.3 276.96,44.86 R17.1 S2.2_1
NetC26_2: C26.2 R7.2 U1.6 | length 5.6
  Top Layer w0.254: C26.2 R7.2 ; C26.2@245.34,40.73 245.389,40.681 U1.6
NetC41_1: C41.1 L3.4 R13.1 U7.2 | length 82.7
  Top Layer w2: L3.4@59.102,41.098 70.66,29.54 70.66,19.47 75.13,15 R13.1 87.883,15 91.883,19 108.7,19 113.76,24.06 U7.2
NetC41_2: C41.2 C42.1 R13.2 R14.1 | length 32.1
  Top Layer w2: R13.2 R14.1 87.86,35 91.94,39.08 95.92,39.08 C42.1 C41.2
NetC42_2: C42.2 C44.1 R14.2 R15.1 | length 32.1
  Top Layer w2: R14.2 R15.1 87.98,55 92.01,59.03 95.97,59.03 C44.1 C42.2
NetC44_2: C44.2 C45.1 R15.2 R16.1 | length 32
  Top Layer w2: R15.2 R16.1 88.17,75 92.14,78.97 95.97,78.97 C45.1 C44.2
NetC45_2: C45.2 L3.3 R16.2 U7.1 | length 111
  Top Layer w2: L3.3 47,47.4 67.17,67.57 67.17,80.8 77.37,91 R16.2 87.78,91 92.16,86.62 107.31,86.62 113.99,79.94 U7.1
NetD1_C: D1.C L1.1 U2.2 | length 29.2
  Top Layer w0.5: U2.2@212.832,52.368 U2.2 208.6,52.4 207.5,51.3 207.5,44.3 210.5,41.3 210.5,40.1 D1.C 215.326,39.574 218.228,36.672 L1.1
NetD2_1: D2.1 RE1.3 T1.1 | length 16.2
  Top Layer w0.254: RE1.3 RE1.3@260.697,3.703 ; D2.1@265.774,3.703 266.497,2.98 D2.1
  Top Layer w0.4: RE1.3 261.82,2.58 D2.1 268.29,2.58 269.801,4.091 T1.1@269.801,8.38
NetD2_2: D2.2 R11.1 RE1.1 | length 24.7
  Top Layer w0.254: R11.1 R11.1@264.004,9.86 ; D2.2@265.774,7.303 D2.2
  Top Layer w0.4: RE1.1 251.38,6.58 D2.2 266.497,7.367 R11.1@264.004,9.86
NetF1_1: F1.1 J6.2 | length 45.8
  Top Layer w2: F1.1@15,77.25 15,82.45 15,87.65 15.055,87.705 40.135,87.705 40.19,87.76 J6.2@40.19,77.6 ; J6.2@40.205,87.655 J6.2@40.21,87.66
NetF1_2: F1.2 RV1.2 TH1.1 | length 42.9
  Top Layer w2: TH1.1 14.86,46.21 15,46.35 15,51.55 F1.2@15,56.75
NetFB2_1: FB2.1 U6.3 | length 6.3
  Top Layer w0.254: FB2.1 288.8,79.2 289.5,79.9 292,79.9 292.373,79.527 U6.3
NetJ1_10: J1.10 R150.1 | length 28.9
  Top Layer w0.254: R150.1 231.34,79.16 230.8,79.7 230.8,96.8 232.2,98.2 238.214,98.2 239.59,96.824 J1.10
NetJ3_2: J3.2 R8.1 | length 40.6
  Top Layer w0.254: R8.1 274.97,39.67 275.093,39.547 275.093,39.497 277.77,36.82 277.77,16.14 284.68,9.23 287.23,9.23 289.19,7.27 J3.2
NetJ6_1: J6.1 L3.1 RV1.1 | length 101.3
  Top Layer w2: RV1.1 30.43,25.67 36.03,20.07 L3.1@46.93,20.07 ; L3.1 L3.1@46.93,20.07 ; J6.1@50.35,87.76 50.35,77.6 50.35,66.01 37.66,53.32 37.66,29.34 L3.1@46.93,20.07
NetL3_2: L3.2 TH1.2 | length 40
  Top Layer w2: TH1.2 30.93,8.83 47.93,8.83 L3.2
NetR3_1: R3.1 U5.11 | length 2.4
  Top Layer w0.254: U5.11 281.097,67.427 281.103,67.421 281.103,66.847 282.203,65.747 R3.1@282.203,65.503
NetR12_2: R12.2 T1.2 T1.4 | length 3.9
  Top Layer w0.254: R12.2@267.738,12.01 270.54,12.01 T1.4@271.3,11.25
NRST: P1.5 SB1.1 U1.25 | length 40.5
  Top Layer w0.254: U1.25 263.981,31.181 v1(267,34.2) ; v1(270.8,46.6) 272.7,48.5 SB1.1 274.5,50.123 275.03,50.653 P1.5
  Bottom Layer w0.254: v1(267,34.2) 267,42.8 v1(270.8,46.6)
PA8: U1.100
PA9: R8.2 U1.101 | length 3.9
  Top Layer w0.254: U1.101 270.018,39.675 273.914,39.675 R8.2
PA10: U1.102
PA13: P1.4 U1.105 | length 20.1
  Top Layer w0.254: U1.105 279.381,41.681 280.2,42.5 280.2,48.2 277.57,50.83 P1.4
PA14: P1.2 U1.109 | length 21.2
  Top Layer w0.254: U1.109 268.212,49.812 271.1,52.7 280.94,52.7 P1.2
PB3: P1.6 U1.133 | length 23.2
  Top Layer w0.254: U1.133 256.221,44.972 256.221,43.619 256.68,43.16 268.26,43.16 268.9,43.8 268.9,47.4 P1.6
PB6: R150.2 R151.1 U1.136 | length 43
  Top Layer w0.254: R150.2 233.335,79.155 233.335,77.805 R151.1 233.34,72.56 254.712,51.188 U1.136
PC8: J1.7 R153.1 U1.98 | length 67.7
  Top Layer w0.254: v1(235.6,79.3) 235.617,79.317 235.617,80.363 R153.1 235.617,80.397 235.617,84.267 J1.7 ; v1@253.375,41.925 257.119,38.181 U1.98
  Bottom Layer w0.254: v1(235.6,79.3) 235.6,59.7 v1(253.2,42.1)
PC9: J1.8 R152.1 U1.99 | length 67.5
  Top Layer w0.254: J1.8 234.49,84.274 234.49,80.37 R152.1 234.48,78.92 236.3,77.1 v1(236.3,75.6) ; v1(254.456,42.044) 257.819,38.681 U1.99
  Bottom Layer w0.254: v1(236.3,75.6) 236.3,60.13 254.386,42.044 v1(254.456,42.044)
PC10: J1.1 R156.1 U1.111 | length 55.3
  Top Layer w0.254: J1.1 242.2,82.8 242.7,82.3 243.6,82.3 244.4,81.5 244.4,80.05 ; R156.1 244.25,79.3 244.127,79.177 244.127,79.127 243.927,78.927 243.927,78.915 243.735,78.723 243.723,78.723 242.8,77.8 242.8,66.1 257.5,51.4 264.026,51.4 267.212,48.214 U1.111 ; R156.1@244.4,79.3 244.4,79.5 244.4,80
PC11: J1.2 R155.1 U1.112 | length 55.1
  Top Layer w0.254: J1.2 241.1,82.8 242.3,81.6 R155.1 241.596,80.396 241.596,80.186 241.637,80.145 241.637,79.375 240.7,78.438 240.7,67.542 257.296,50.946 263.838,50.946 266.712,48.072 U1.112
PC12: J1.5 U1.113 | length 54.9
  Top Layer w0.254: J1.5 237.8,82.077 239,80.877 v1(239,80.8) ; v1(239,75.2) 239,68.6 257.108,50.492 263.65,50.492 266.212,47.93 U1.113
  Bottom Layer w0.254: v1(239,75.2) v1(239,80.8)
PD2: J1.3 R154.1 U1.116 | length 54.8
  Top Layer w0.254: J1.3 240.005,84.279 240.005,79.765 R154.1 240.01,79.21 238.319,77.519 238.319,68.639 256.92,50.038 263.462,50.038 264.712,48.788 U1.116
PG0: R12.1 U1.56 | length 14
  Top Layer w0.254: U1.56 260.212,22.098 267.73,14.58 R12.1
PH0: R4.1 U1.23 | length 6.3
  Top Layer w0.254: R4.1 243.542,34.274 243.665,34.151 243.665,34.101 243.832,33.934 245.722,33.934 247.475,32.181 U1.23
PH1: R5.1 U1.24 | length 6.3
  Top Layer w0.254: R5.1 243.562,33.198 243.685,33.321 243.685,33.331 243.834,33.48 245.476,33.48 247.275,31.681 U1.24
RST: R2.1 U5.9 | length 36.6
  Top Layer w0.254: R2.1 261.2,91.8 v1(261.7,91.3) ; v1(271.9,75.7) 271.9,71.8 v1(272.6,71.1) ; v1(279.7,66.1) 279.7,66.164 280.1,66.564 U5.9
  Bottom Layer w0.254: v1(261.7,91.3) 261.7,87.237 271.9,77.037 v1(271.9,75.7) ; v1(272.6,71.1) 277.6,66.1 v1(279.7,66.1)
RXD0: U4.34 U5.26 | length 23.6
  Top Layer w0.254: v1(280.1,89.1) 280.1,81.9 282.246,79.754 282.246,77.546 280.6,75.9 U5.26 ; v1(281.462,90.9) 281.462,90.962 282.18,91.68 U4.34
  Bottom Layer w0.254: v1(280.1,89.1) 281.396,90.396 281.396,90.834 v1(281.462,90.9)
SCL: J4.2 R9.2 U1.69 | length 26
  Top Layer w0.254: U1.69 266.712,18.728 270.78,14.66 276.57,14.66 279.38,11.85 J4.2
SDA: J4.3 R10.2 U1.70 | length 26.7
  Top Layer w0.254: U1.70 267.212,19.038 271.08,15.17 277.55,15.17 280.63,12.09 J4.3
TXD0: U4.35 U5.25 | length 24.8
  Top Layer w0.254: U5.25 281.1,75.7 282.7,77.3 282.7,79.942 280.781,81.861 280.781,92.081 281.65,92.95 U4.35
VBUS: C15.2 C16.2 D3.1@272.45,65.2 P2.1 U5.7 U5.8 | length 21.3
  Top Layer w0.254: v1(271.7,63.2) 272.45,63.95 D3.1@272.45,65.2 ; U5.7 278.73,67.87 278.95,67.65 ; U5.8 279.17,67.43 278.95,67.65 ; C15.2 278.8,64.2 C16.2 278.7,67.4 278.95,67.65
  Bottom Layer w0.254: P2.1 270.08,63.2 274.9,63.2 277,65.3 v1(278.7,65.3)
VDD: C6.1 C8.1 C10.1 C11.1 C12.2 C13.1 C27.1 C28.1 C29.1 C30.1 C31.1 C32.1 C33.1 C34.1 C35.1 C36.1 C37.1 C38.1 C39.1 D3.5 FB2.2 IC1.2 J1.4 J4.4 L2.1 P1.1 R1.1 R2.2 R7.1 R9.1 R10.1 R11.2 R17.2 R151.2 R152.2 R153.2 R154.2 R155.2 R156.2 U1.17 U1.30 U1.39 U1.52 U1.62 U1.72 U1.84 U1.95 U1.108 U1.121 U1.131 U1.143 U1.144 U4.2 U5.6 | length 96.9
  Top Layer w0.25: v1(251.7,20.8) C29.1 ; C29.1@251.712,21.638 U1.39
  Top Layer w0.254: v1(232.2,80.4) 232.22,80.38 233.406,80.38 R152.2@233.466,80.32 ; v1(234.3,76.5) 234.32,76.52 234.32,77.78 R151.2 ; R153.2 v1@237.753,80.38 ; J1.4 v1(238.9,85.63) ; v1(239.9,23.9) 239.9,23.192 240.122,22.97 L2.1@240.742,22.97 ; R154.2@241.005,79.76 v1@241.005,80.795 ; v1(243.3,80.2) R155.2 ; R156.2@243.319,79.381 v1@243.319,80.181 ; v1(243.4,42.7) 243.405,42.695 244.255,42.695 R7.1@244.26,42.7 ; v1(245.2,35.1) 245.25,35.15 246.15,35.15 C33.1 ; v1(245.5,30.9) 245.506,30.894 245.506,30.058 245.556,30.008 C30.1 ; C30.1@245.6,29.926 245.685,29.841 245.759,29.841 246.919,28.681 U1.30 ; C33.1@246.323,35.181 U1.17@248.908,35.181 ; C32.1 v1(250.412,46.981) 250.712,46.681 U1.144@250.712,45.381 ; U1.143 251.212,46.638 251.512,46.938 v1(251.512,46.96) C34.1 ; v1(251.9,96.7) 251.966,96.634 252.066,96.634 253.284,95.416 C13.1@253.284,95.166 ; C13.1@253.3,95.166 C13.1 253.675,95.325 259.5,95.325 C11.1 266.185,95.325 U4.2 ; C35.1@257.2,47.593 v1@257.2,48.7 ; U1.131 C35.1@257.212,47.581 ; C35.1@257.262,47.644 C35.1 ; v1(258.2,20.8) C27.1 258.2,23.106 258.212,23.119 U1.52 ; v1(260.7,93.8) R2.2 R1.1 ; C36.1@262.113,47.493 v1@262.113,48.387 ; U1.121 C36.1@262.212,47.394 ; v1(263.2,20.6) C28.1 ; C28.1@263.212,21.738 U1.62 ; U1.72 272.781,23.881 273.077,24.177 273.077,24.227 273.2,24.35 C31.1 ; U1.84 C39.1 ; U1.95 270.017,36.685 272.306,36.685 C38.1 ; U1.108 271.049,43.181 271.434,43.566 271.434,44.397 271.583,44.546 271.956,44.546 C37.1 272.06,44.7 272.384,45.024 272.384,45.354 v1(272.45,45.42) ; C38.1@272.33,36.7 273.3,36.7 v1(273.31,36.71) ; C39.1 273.02,31.19 273.99,31.19 v1(274,31.2) ; D3.5 273.4,68.591 273.7,68.891 v1(273.7,68.9) ; v1(276.2,42.6) 276.8,42.6 276.96,42.76 R17.2 ; v1(277.1,68.4) 277.194,68.4 277.594,68.8 U5.6 ; v1(277.3,10) 277.305,10.005 278.265,10.005 R9.1 ; R10.1 281.69,10.01 282.69,10.01 v1(282.7,10) ; FB2.2 v1(288,81.1)